# Altium PCB 主板-0915改综合.PcbDoc (part 1 of 3)
Units mm, origin at the board's own origin, x right, y up, seen from the top; angles counter-clockwise.
Board outline 97.69 x 103.45 mm, 2 copper layers (Top Layer, Bottom Layer); 78 components, 74 nets, 243 pads, 282 vias.
Unrouted connection lines stored in the file: 6.
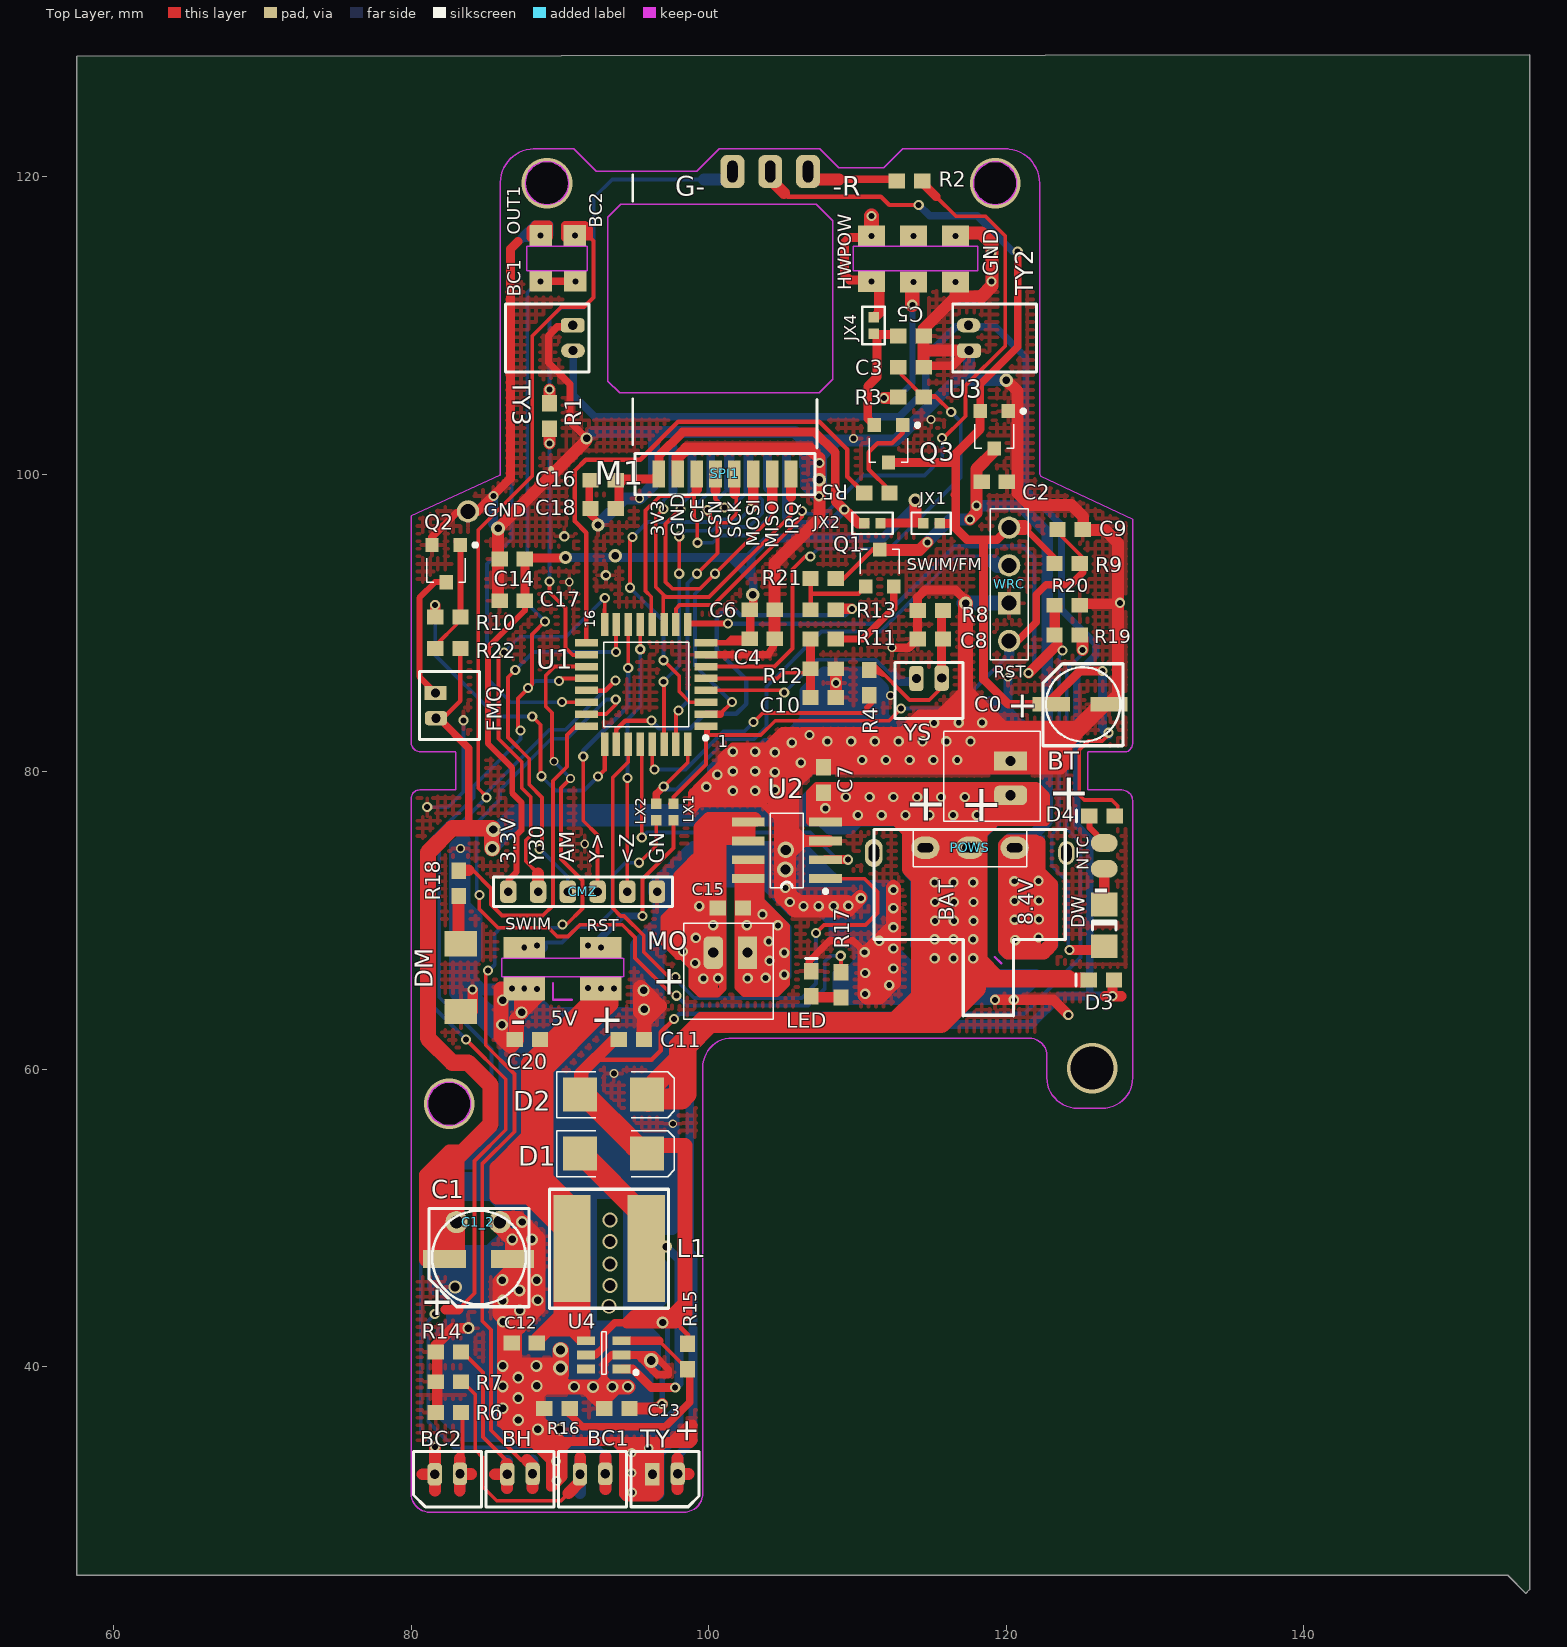
[diagram p0: Top Layer view]
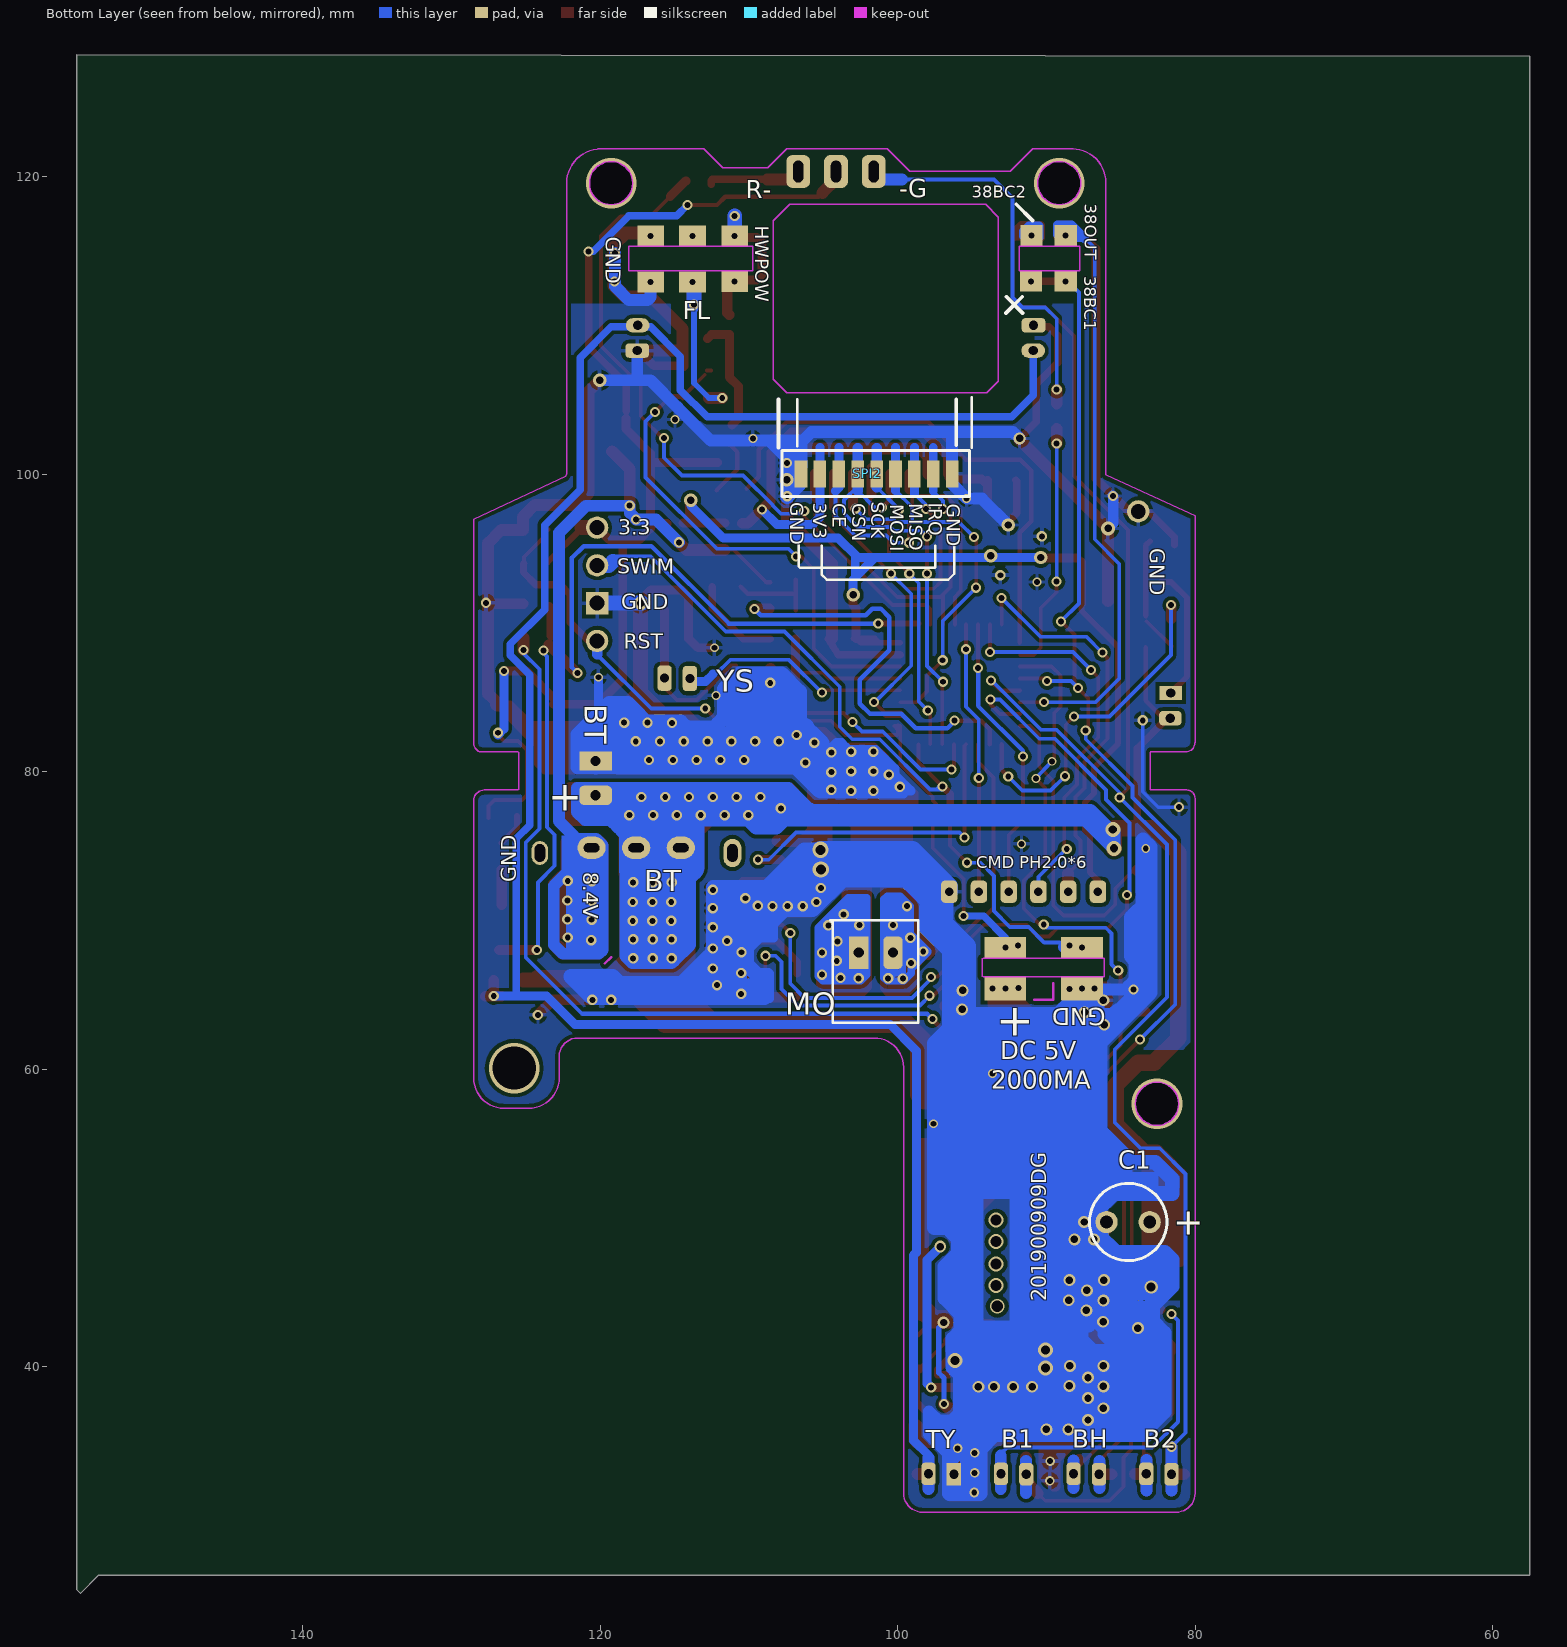
[diagram p1: Bottom Layer view, seen from below]

## Layer stack, top to bottom
Top Layer: signal copper 0.0356
Dielectric: dielectric 0.32, FR-4, Dk 4.8
Bottom Layer: signal copper 0.0356

## Board outline
57.506,128.118 57.506,25.984 153.721,25.984 154.94,24.765 155.194,25.019 155.194,128.219

## Design rules (kind name [scope] priority, off if disabled: settings)
Clearance [All] p1: gap=0.254
PolygonConnect [All] p1: connectstyle=Relief reliefconductorwidth=0.254 reliefentries=4 polygonreliefangle="90 Angle"
RoutingVias [All] p1: holewidth=0.711 width=1.27 viastyle="Through Hole" minholewidth=0.711 minwidth=1.27 maxholewidth=0.711 maxwidth=1.27
SilkscreenOverComponentPads [All] p1: minsilkscreentomaskgap=0.254
SolderMaskExpansion [All] p1: expansion=0.102
Width [All] p1: maxlimit=2 minlimit=0.254 preferedwidth=0.254 minimp=50.000000 maximp=50.000000 favimp=50.000000
27 further rules are at their usual default settings.

## Components (designator, comment, footprint, x,y, rotation, side; value= is the part's Value field where it differs from the comment)
BC1 "1.5*2P" MHDR1X2#1 92.88,32.8 r180 top locked (schematic designator BT)
BC2 "1.5*2P" MHDR1X2#1 83.12,32.8 r180 top locked (schematic designator BT)
BH "1.5*2P" MHDR1X2#1 88,32.8 r180 top locked (schematic designator BT)
BT "PH2.0-W" HDR1X2#1 120.3,78.032 r90 top locked
C0 "47uf  5*5.8" CC3216-1206#1 123.7,84.932 r0 top locked
C1 "220UF" CC3216-1206#2 85.3,46.785 r180 top locked
C1_2 "" HDR1X2#2 76.987,50.285 r180 top locked
C2 "0.1uf" CR1608-0603#1 119.2,99.5 r180 top locked
C3 "0.01uf" CR1608-0603#1 113.6,107.2 r180 top locked
C4 "0.1uf" CR1608-0603#1 103.6,88.951 r0 top locked (schematic designator C6)
C5 "10uf" CR1608-0603#1 113.6,109.3 r180 top locked (schematic designator C2)
C6 "0.01uf" CR1608-0603#1 103.6,90.9 r180 top locked (schematic designator C7)
C7 "0.1uf" CR1608-0603#1 107.723,79.45 r270 top locked (schematic designator C11)
C8 "0.01uf" CR1608-0603#1 114.9,88.932 r0 top locked
C9 "0.1uf" CR1608-0603#1 124.3,96.3 r180 top locked
C10 "0.01uf" CR1608-0603#1 107.7,85 r0 top locked (schematic designator R11)
C11 "10uf" CR1608-0603#1 94.8,62 r0 top locked
C12 "10uf" CR1608-0603#1 87.6,41.6 r180 top locked
C13 "1uf" CR1608-0603#1 93.83,37.2 r180 top locked
C14 "10uf" CR1608-0603#1 86.792,94.3 r180 top locked (schematic designator R6)
C15 "0.1uf" CR1608-0603#1 101.46,70.85 r0 top locked (schematic designator C4)
C16 "0.1uf" CR1608-0603#1 92.9,99.6 r0 top locked (schematic designator C4)
C17 "10uf" CR1608-0603#1 86.792,91.5 r180 top locked (schematic designator R6)
C18 "0.01uf" CR1608-0603#1 92.9,97.7 r0 top locked (schematic designator C4)
C20 "10uf" CR1608-0603#1 87.808,62 r0 top locked
CMZ "CMD PH2.0*6" MHDR1X7 94.15,71.944 r180 top locked
D1 "SS24" DSO-C2/X2.3 93.6,54.33 r0 top locked
D2 "SS24" DSO-C2/X2.3 93.6,58.3 r0 top locked (schematic designator D3)
D3 "SS14" CC1608-0603 126.4,66 r0 top locked (schematic designator D8)
D4 "SS14" CC1608-0603 126.441,77.038 r0 top (schematic designator R4)
DM "3*4*2小龟按钮" HDR1X2#3 85.344,70.032 r90 top locked (schematic designator FW)
DW "WD" CC3216-1206#3 126.6,69.672 r270 top
FMQ "1.5*2P" MHDR1X2#2 81.636,85.141 r270 top (schematic designator BT)
JX1 "" CR1005-0402 114.986,96.7 r0 top locked (schematic designator R8)
JX2 "" CR1005-0402 111,96.7 r180 top locked
JX4 "" CR1005-0402 111.1,110 r90 top locked (schematic designator R8)
L1 "22UH" L7 93.3,47.94 r180 top locked
LED "LED-DM" CC1608-0603 106.9,65.75 r270 top locked
LX1 "4.7K" CR1005-0402 97.638,77.292 r90 top locked (schematic designator R8)
LX2 "4.7K" CR1005-0402 96.469,77.292 r90 top locked (schematic designator R8)
MO "PH2.0-W" HDR1X2#4 103,67.843 r180 top locked (schematic designator BT)
POWS "SS12F23" HDR1X3 120.114,74.892 r180 top locked (schematic designator WS)
Q1 "S8050" SO-G3/C2.5 111.5,93.7 r0 top locked
Q2 "S8550" SO-G3/C2.5 82.35,94 r180 top locked
Q3 "S8550" SO-G3/C2.5 112.09,102.057 r180 top (schematic designator U5)
R1 "1K" CR1608-0603#1 89.3,103.919 r270 top locked
R2 "1K" CR1608-0603#1 113.5,119.732 r0 top locked
R3 "1K" CR1608-0603#1 113.6,105.2 r180 top locked
R4 "1K" CR1608-0603#1 110.8,86 r270 top locked
R5 "10K" CR1608-0603#1 111.303,98.755 r180 top (schematic designator R7)
R6 "500K" CR1608-0603#1 82.5,36.932 r180 top locked
R7 "500K" CR1608-0603#1 82.5,38.989 r0 top locked (schematic designator R6)
R8 "1M" CR1608-0603#1 114.9,90.856 r180 top locked
R9 "10K" CR1608-0603#1 124.1,94 r180 top locked
R10 "1K" CR1608-0603#2 82.46,90.4 r180 top (schematic designator R7)
R11 "1M" CR1608-0603#1 107.7,88.932 r180 top locked (schematic designator C10)
R12 "500K" CR1608-0603#1 107.7,86.932 r180 top locked
R13 "22K" CR1608-0603#1 107.7,90.9 r0 top locked
R14 "500K" CR1608-0603#1 82.5,41 r0 top locked (schematic designator R21)
R15 "100K" CR1608-0603#1 98.577,40.691 r270 top locked
R16 "7.89K" CR1608-0603#1 89.8,37.2 r180 top locked
R17 "1K" CR1608-0603#1 108.9,65.681 r90 top locked (schematic designator R19)
R18 "10K" CR1608-0603#1 83.2,72.5 r90 top locked
R19 "10K" CR1608-0603#1 124.1,89.2 r180 top locked (schematic designator R9)
R20 "4.7K" CR1608-0603#1 124.1,91.2 r180 top locked
R21 "22K" CR1608-0603#1 107.7,93 r180 top locked
R22 "10K" CR1608-0603#2 82.46,88.3 r180 top (schematic designator R7)
SPI1 "SI24R1" MHDR1X8 105.537,100.032 r180 top locked
SPI2 "NRF24RL01" MHDR1X8 97.6,100.032 r0 bottom locked
TY "1.5*2P" MHDR1X2#3 97.75,32.8 r180 top locked (schematic designator BT)
TY2 "1.5*2P" MHDR1X2#4 117.475,109.855 r270 top locked (schematic designator BT)
TY3 "1.5*2P" MHDR1X2#4 90.881,108.483 r90 top locked (schematic designator BT)
U1 "STM8L151K4T6" TQFP32 95.8,85.877 r180 top locked
U2 "MX380（RZ7889D）" SO8 105.254,74.722 r90 top locked
U3 "ME6209-V1RK" SO-G3/C2.5 119.2,103 r180 top locked (schematic designator U5)
U4 "SX1308   B6287K  B6286" SOT23-6_M 92.95,40.8 r180 top locked
WRC "2.54HP" HDR1X4 120.2,88.8 r90 top locked (schematic designator SX)
YS "1.5*2P" MHDR1X2#5 115.5,86.3 r180 top locked (schematic designator BT)

## Footprints (in the part's own frame and the unit in brackets; to place one, negate y for a bottom-side part, rotate by r counter-clockwise, add the part's x,y. Pads: shape width x height; smd on the part's side, far side on the other; paste and mask are expansions set on the pad)
CC1608-0603 [mm] "Chip Capacitor; B"
  rect 1.1x1 smd: 1(-0.85,0) 2(0.85,0)
  silkscreen extent -1.7,-0.4 -1.7,0.4
CC3216-1206#1 [mm]
  rect 2.5x1 smd: 1(-0.662,-0.386) 2(3.213,-0.386)
CC3216-1206#2 [mm]
  rect 2.9x1.2 smd: 1(-1.5,-0.45) 2(3.068,-0.455)
CC3216-1206#3 [mm] "Chip Capacitor; Body 3.2 x 1.6 mm (LxW t"
  rect 1.6x1.8 smd: 1(-1.4,0) 2(1.4,0)
  silkscreen extent -0.3,-0.8 0.3,0.8
CR1005-0402 [mm]
  rect 0.7x0.7 smd: 1(-0.55,0) 2(0.55,0)
CR1608-0603#1 [mm]
  rect 1.1x1 smd: 1(-0.85,0) 2(0.85,0)
CR1608-0603#2 [mm]
  rect 1.1x1 smd: 1(-0.85,0)
  rect 1.1x1 smd paste+0: 2(0.85,0)
DSO-C2/X2.3 [mm] "DO-214-AA/SMB; 2 C-Bend Leads; Body 5.3 x 3.6 mm, inc. leads (LxW)"
  rect 2.3x2.3 smd: 1(-2.25,0) 2(2.25,0)
  silkscreen extent -3.8,-1.55 4.1,1.55
HDR1X2#1 [mm]
  rrect50% 1.3x2.2 hole 0.68: 1(0.39,0)
  rect 1.3x2.2 hole 0.68: 2(2.692,0.003)
  silkscreen extent -1.34,-1.99 4.68,4.49
HDR1X2#2 [mm] "Connector; Header; 2 Position"
  round 1.5 hole 0.86: 1(-8.963,0.558) 2(-6.063,0.558)
HDR1X2#3 [mm]
  rect 1.7x2.2 smd: 1(-6.147,2.004) 2(-1.6,2.004)
HDR1X2#4 [mm]
  rect 1.3x2.2 hole 0.68: 1(0.39,0)
  rrect50% 1.3x2.2 hole 0.68: 2(2.692,0.003)
  silkscreen extent -1.34,-1.99 4.68,4.49
HDR1X3 [mm]
  oval 1.9x1.5 hole 0.6 slot 1.05 at 0 deg: 1(-0.46,0) 2(2.54,0) 3(5.54,0)
  silkscreen extent -1.27,-1.27 6.35,1.27
HDR1X4 [mm]
  round 1.5 hole 1: 1(0,0) 3(5.08,0) 4(7.62,0)
  rect 1.5x1.5 hole 1: 2(2.54,0)
  silkscreen extent -1.27,-1.27 8.89,1.27
L7 [mm]
  rect 2.5x7.2 smd: 1(2.5,0) 2(-2.5,0)
  silkscreen extent -4,-4 4,4
MHDR1X2#1 [mm]
  rrect50% 0.96x1.5 hole 0.62: 1(-0.164,0) 2(1.536,0.026)
  silkscreen extent -1.6,-1.49 2.97,2.22
MHDR1X2#2 [mm]
  rect 0.96x1.5 hole 0.62: 1(-0.164,0)
  rrect50% 0.96x1.5 hole 0.62: 2(1.536,0.026)
  silkscreen extent -1.6,-1.07 2.97,2.97
MHDR1X2#3 [mm]
  rrect50% 0.96x1.5 hole 0.62: 1(-0.164,0)
  rect 0.96x1.5 hole 0.62: 2(1.536,0.026)
  silkscreen extent -1.6,-1.52 2.97,2.22
MHDR1X2#4 [mm]
  oval 0.96x1.6 hole 0.62: 1(-0.164,0)
  rrect50% 0.96x1.6 hole 0.62: 2(1.536,0.026)
  silkscreen extent -1.6,-1.07 2.97,4.55
MHDR1X2#5 [mm]
  rrect50% 0.96x1.7 hole 0.62: 1(-0.164,0) 2(1.536,0.026)
  silkscreen extent -1.6,-1.07 2.97,2.72
MHDR1X7 [mm] "Connector; Header; 7 Position"
  rrect50% 1.1x1.5 hole 0.58: 2(-2.38,0) 3(-0.38,0) 4(1.62,0) 5(3.62,0) 6(5.62,0) 7(7.62,0)
  silkscreen extent -3.41,-1 8.62,1
MHDR1X8 [mm] "Connector; Header; 8 Position"
  rect 0.85x1.8 smd: 1(0,0) 2(1.27,0) 3(2.54,0) 4(3.81,0) 5(5.08,0) 6(6.35,0) 7(7.62,0) 8(8.89,0)
  silkscreen extent -1.6,-1.37 10.49,1.4
SO8 [mm]
  rect 0.6x2.2 smd: 1(-1.905,-2.6) 2(-0.635,-2.6) 3(0.635,-2.6) 4(1.905,-2.6) 5(1.905,2.6) 6(0.635,2.6) 7(-0.635,2.6) 8(-1.905,2.6)
  silkscreen extent -2.88,-2.72 2.5,1.1
SO-G3/C2.5 [mm]
  rect 0.9x0.95 smd: 1(-0.95,-1.25) 2(0.95,-1.25) 3(0,1.25)
  silkscreen extent -1.3,-0.38 1.3,1.25
SOT23-6_M [mm]
  rect 1.2x0.59 smd: 1(-1.2,0.95) 2(-1.2,0) 3(-1.2,-0.95) 4(1.2,-0.95) 5(1.2,0) 6(1.2,0.95)
  silkscreen extent -2.29,-1.55 0.15,1.31
TQFP32 [mm] "QFP; 32 Leads; Body 7 x 7 mm; Pitch 0.8 mm"
  rect 1.55x0.5 smd: 1(-4.025,2.8) 2(-4.025,2) 3(-4.025,1.2) 4(-4.025,0.4) 5(-4.025,-0.4) 6(-4.025,-1.2) 7(-4.025,-2) 8(-4.025,-2.8) 18(4.025,-2) 19(4.025,-1.2) 20(4.025,-0.4) 21(4.025,0.4) 22(4.025,1.2) 23(4.025,2) 24(4.025,2.8)
  rect 0.5x1.55 smd: 9(-2.8,-4.025) 10(-2,-4.025) 11(-1.2,-4.025) 12(-0.4,-4.025) 13(0.4,-4.025) 14(1.2,-4.025) 15(2,-4.025) 16(2.8,-4.025) 26(2,4.025) 27(1.2,4.025) 28(0.4,4.025) 29(-0.4,4.025) 30(-1.2,4.025) 31(-2,4.025) 32(-2.8,4.025)
  rect 1.55x0.5 smd mask+0.102: 17(4.025,-2.8)
  rect 0.5x1.55 smd paste+0: 25(2.8,4.025)
  silkscreen extent -4.13,-2.85 2.85,3.72

## Part data
D3: library part "Cap Semi", "Capacitor (Sem"
DW: library part "Cap Semi"
LX2: library part Res3
U1: library part ST72F324K4T6

## Free pads (board coordinates)
  rect 2.8x1.6 hole 0.4: 0(87.6,65.432)
  rect 2.8x1.4 hole 0.4: 0(87.6,68.182) 0(92.75,68.182)
  rect 1.5x1.4 hole 0.4: 0(88.7,112.98) 0(88.7,116.053) 0(91,116.053) 0(91.032,112.98)
  round 0.4 smd: 0(89.408,100.355)
  rect 2.8x1.6 hole 0.4 mask+0.102: 0(92.75,65.432)
  rect 0.85x1.8 smd far side: 0(96.33,100.032)
  rrect50% 1.6x2.2 hole 0.68 slot 1.46 at 90 deg: 0(101.6,120.36) 0(104.14,120.36) 0(106.68,120.36)
  rect 1.8x1.4 hole 0.4: 0(110.95,112.956) 0(110.95,116.032) 0(113.78,112.932) 0(113.78,116.032) 0(116.6,112.932) 0(116.6,116.032)
  oval 1.2x1.9 hole 0.7 slot 1.2 at 90 deg: 3(111.103,74.545)
  round 1.5 hole 1 paste+0: 4(83.82,97.511)
  oval 1.1x1.6 hole 0.7 slot 1.2 at 90 deg: 4(124.051,74.545)
  oval 1.8x1.2 smd: 4(126.6,73.482) 4(126.6,75.209)

## Via types
v1: diameter 0.7, hole 0.4, Top Layer to Bottom Layer, 111 vias
v2: diameter 0.68, hole 0.4, Top Layer to Bottom Layer, 90 vias
v3: diameter 0.8, hole 0.5, Top Layer to Bottom Layer, tented both sides, 27 vias
v4: diameter 0.6, hole 0.4, Top Layer to Bottom Layer, 13 vias
v5: diameter 0.9, hole 0.5, Top Layer to Bottom Layer, 8 vias
v6: diameter 0.65, hole 0.4, Top Layer to Bottom Layer, tented both sides, 6 vias
v7: diameter 0.8, hole 0.5, Top Layer to Bottom Layer, 6 vias
v8: diameter 1, hole 0.75, Top Layer to Bottom Layer, tented both sides, 5 vias
v9: diameter 3.4, hole 2.9, Top Layer to Bottom Layer, 4 vias
v10: diameter 0.8, hole 0.4, Top Layer to Bottom Layer, 2 vias
v11: diameter 1.1, hole 0.68, Top Layer to Bottom Layer, 2 vias
v12: diameter 1, hole 0.56, Top Layer to Bottom Layer, tented both sides, 2 vias
v13: diameter 1, hole 0.6, Top Layer to Bottom Layer, tented both sides, 2 vias
v14: diameter 0.9, hole 0.6, Top Layer to Bottom Layer, tented both sides, 1 vias
v15: diameter 0.95, hole 0.5, Top Layer to Bottom Layer, 1 vias
v16: diameter 0.7, hole 0.4, Top Layer to Bottom Layer, tented bottom, 1 vias
v17: diameter 1, hole 0.6, Top Layer to Bottom Layer, tented bottom, 1 vias

## Nets (pads, with @x,y where several pads share a name; then routed paths per layer and width w, separated by ;. In a path a pad name is that pad's centre, name@x,y a point inside that pad or via, vN(x,y) a via of type N, cw(c..) or ccw(c..) an arc to the next point about the centre after c; other vN are vias at no path point)
1D-: D1.1 L1.2 U4.1 | length 22.5
  Top Layer w0.59: U4.1@94.2,39.85 94.897,39.85 96.139,38.608 v16@97.638,38.608
  Top Layer w0.8: L1.2@95.8,49.98 95.8,49.081 96.23,48.652 L1.2@96.23,49.476
  Top Layer w1.5: D1.1@91.35,54.43 L1.2@95.8,49.98
  Bottom Layer w0.6: v3(97.13,48.082) 98.019,47.193 98.019,38.887 v16(97.739,38.608)
1R-1: R15.2 R16.1 U4.3 | length 17.1
  Top Layer w0.254: 96.655,41.75 R15.2@98.564,39.841
  Top Layer w0.5: R16.1@90.85,37.2 90.673,37.023 90.673,36.809 91.516,35.966 97.079,35.966 98.73,37.617 R15.2@98.73,39.841
  Top Layer w0.59: U4.3@94.15,41.75 96.655,41.75 ; R15.2@98.564,39.841 R15.2@98.73,39.841
3-BH: BH.2 R14.2 | length 13
  Top Layer w0.254: R14.2@83.45,41 84.836,39.614 84.836,35.281 86.411,33.706 BH.2@86.411,33.477
  Top Layer w0.8: 85.623,32.774 BH.2@86.464,32.774 ; BH.2@86.411,33.477 86.436,33.452 86.436,31.852
  Bottom Layer w0.8: 86.436,31.852 86.436,33.655
3-WZ: BC2.1 R6.1 | length 10.2
  Top Layer w0.254: BC2.1@83.284,32.8 83.24,32.8 83.45,33.01 R6.1@83.45,36.932
  Top Layer w0.8: 83.261,31.674 83.261,33.833 ; BC2.1@83.284,32.8 83.293,32.791 84.023,32.791
  Bottom Layer w0.3: 83.284,31.793 BC2.1@83.284,32.8
  Bottom Layer w0.8: 83.261,31.674 83.266,33.731
3.3V: C0.1 C4.1 C6.2 C14.1 C16.2 C17.1 C18.2 CMZ.7 D4.2 JX1.1 JX1.2 JX2.1 JX2.2 pad.0@104.14,120.36 Q3.3 R9.2 SPI1.8 SPI2.7 U1.8 U3.2 WRC.4 | length 190.5
  Top Layer w0.254: v2(126.873,82.626) 126.873,82.474 126.467,82.067 125.527,82.067 124.917,81.458 124.917,78.435 125.247,78.105 127.102,78.105 127.508,77.699 D4.2@127.508,76.886
  Top Layer w0.3: 105.054,118.923 105.308,118.669 111.582,118.669 112.141,118.11 v2(114.122,118.11)
  Top Layer w0.4: CMZ.7@86.53,71.944 86.53,72.712 87.071,73.254 87.071,75.743 87.401,76.073 87.401,77.953 86.792,78.562 86.792,80.264 85.166,81.89 85.166,88.367 87.642,90.842 C17.1@87.642,91.5 ; C16.2@93.966,99.593 94.056,99.593 C16.2@94.158,99.492 ; SPI1.8@96.647,99.746 SPI1.8@96.647,100.032 ; U1.8@99.825,88.677 100.711,88.677 ; C4.1@102.667,88.873 102.472,88.677 100.711,88.677 ; C4.1@102.95,88.951 101.518,88.951 101.244,88.677 100.711,88.677 ; 121.207,96.42 R9.2@123.539,94.089
  Top Layer w0.5: U3.2@118.25,104.25 118.25,106.055 120.777,108.582 v2(120.777,114.986)
  Top Layer w0.6: C17.1@87.642,91.3 C14.1@87.642,94.1 ; C14.1@87.928,94.386 v5@90.348,94.386 ; C18.2@93.966,97.866 C16.2@93.966,99.593 ; C16.2@94.158,99.492 94.361,99.695 96.31,99.695 SPI1.8@96.647,100.032 96.647,101.239 98.252,102.845 107.137,102.845 108.509,101.473 108.509,98.298 108.56,98.247 ; C4.1@102.794,88.949 102.794,91.008 102.997,91.211 v5@102.997,91.897 ; JX2.1@111.608,96.725 JX1.1@114.436,96.725 ; Q3.3@112.09,100.807 116.591,100.807 ; JX1.2@115.494,96.695 116.611,96.695 ; 116.561,98.628 116.611,98.577 ; 118.25,103.75 118.25,103.035 116.611,101.397 116.611,98.577 ; 118.339,95.606 118.478,95.466 118.478,86.22 120.153,84.546 C0.1@123.038,84.546 ; WRC.4@120.2,96.42 119.386,95.606 117.373,95.606 116.611,96.368 116.611,98.577 ; C0.1@123.138,84.546 C0.1@123.038,84.546 ; v2(126.467,86.792) 124.968,86.792 123.038,84.862 C0.1@123.038,84.546
  Top Layer w0.7: 108.56,98.247 108.56,98.196 110.056,96.7 JX2.2@110.449,96.7
  Top Layer w0.8: pad.0@104.14,120.36 104.14,119.837 105.054,118.923 ; 113.894,96.876 v5(113.894,98.247)
  Top Layer w1: WRC.4@120.2,96.42 121.207,96.42
  Bottom Layer w0.5: v2(114.122,118.11) 114.859,117.373 118.059,117.373 120.447,114.986 v2(120.777,114.986)
  Bottom Layer w0.6: v5(90.373,94.412) 101.498,94.412 ; 102.692,94.412 103.988,95.707 111.709,95.707 113.894,97.892 v5(113.894,98.247) ; 102.845,93.167 102.845,94.412 101.498,94.412 ; v5(102.972,91.897) 102.997,91.923 102.997,92.913 101.498,94.412 ; 105.22,101.803 105.22,97.116 105.694,96.642 108.123,96.642 v2(109.118,97.638) ; WRC.4@120.2,96.42 WRC.4@120.2,96.716 ; v2(126.467,86.792) 126.467,82.88 126.873,82.474 v2(126.873,82.626)
  other v5: 93.726,94.539
3V3: 
5V: C12.1 C20.2 L1.1 pad.0@92.75,65.432 U4.4 | length 99.1
  Top Layer w0.4: U4.4@91.498,41.75 91.318,41.826 U4.4@91.75,41.75
  Top Layer w0.7: L1.1@90.805,45.263 91.059,45.009 91.059,42.189 U4.4@91.389,41.859 ; 90.856,42.393 88.849,42.393 ; 88.849,42.393 89.954,43.497 90.272,43.815 90.272,43.422 C12.1@88.45,41.6 88.45,41.689 88.45,41.993 88.849,42.393
  Top Layer w0.8: C12.1@88.45,41.6 C12.1@88.45,41.689 ; 88.519,52.349 88.519,53.264 ; 88.849,51.664 90.8,49.713 90.8,48.519 L1.1@90.8,47.94 ; 89.954,43.497 89.954,47.094 L1.1@90.8,47.94 ; 90.272,43.815 90.272,45.263 L1.1@90.8,47.94 ; 90.856,42.393 U4.4@91.389,41.859 ; L1.1@91.389,47.351 L1.1@90.8,47.94 ; U4.4@91.65,41.859 L1.1@91.65,47.351 ; 88.519,53.264 88.557,53.302 88.557,56.363 88.519,56.325 88.519,53.264
  Top Layer w1: 87.884,55.499 85.776,53.391 85.776,51.41 87.63,51.41 87.884,51.664 ; 88.849,51.664 87.884,51.664 ; 88.925,59.868 92.75,63.692 ; 88.925,60.833 pad.0@92.75,64.658 ; L1.1@90.8,48.519 87.884,51.435 87.884,51.664 ; L1.1@90.8,49.713 90.8,50.957 89.052,52.705 89.052,56.363 ; pad.0@91.948,64.846 91.948,64.491 87.884,60.427 87.884,51.664 ; 89.052,56.363 88.557,56.363 88.557,60.008 88.138,60.427 88.621,60.427 89.052,59.995 89.052,56.363 ; 92.75,63.692 93.447,64.389 93.447,64.735 pad.0@92.75,65.432 pad.0@92.75,64.658 ; 92.75,63.692 pad.0@92.75,64.658
  other v1: 93.624,65.43 91.872,65.456
8.4V: C2.2 POWS.1 Q1.3 R21.1 U3.3 | length 93.3
  Top Layer w0.3: R21.1@108.571,92.761 108.839,92.761 111.028,94.95 Q1.3@111.5,94.95
  Top Layer w0.4: v1@122.25,72.746 122.452,72.746 122.795,72.746
  Top Layer w0.8: Q1.3@111.633,94.92 114.193,94.92 v2(114.706,95.433) ; v2(117.577,96.977) 118.008,97.409 118.008,100.358 U3.3@119.2,101.55 ; 122.25,75.286 122.25,73.29 122.795,72.746 123.088,72.452 123.088,68.351 122.911,68.174 122.809,68.174 ; 122.422,69.127 122.43,70.077 122.441,71.347 122.452,72.667 122.452,72.746 v1@122.453,72.873
  Top Layer w1: POWS.1@120.117,74.409 POWS.1@119.939,74.587 ; 120.303,73.822 POWS.1@120.303,74.223 ; POWS.1@121.234,75.108 121.412,75.286 ; 121.945,75.196 121.945,75.286 121.412,75.286 ; 122.809,68.174 122.53,67.894 120.117,67.894 119.939,68.072 POWS.1@119.939,74.587 ; POWS.1@119.939,74.587 119.939,75.057 120.167,75.286 121.412,75.286
  Bottom Layer w0.8: v2(114.706,95.433) 116.25,96.977 v2(117.577,96.977) ; 116.738,96.977 v2(117.577,96.977) ; v2(117.577,96.977) 118.008,97.409 v2(118.008,97.892) 120.946,97.892 122.762,96.076 122.762,76.686 121.828,75.753 122.098,75.483 ; 122.098,75.483 120.263,75.483 119.837,75.057 119.837,68.021 120.091,67.767 122.504,67.767 123.114,68.377 123.114,72.339 122.098,73.355 122.098,75.483
  Bottom Layer w1: POWS.1@120.091,74.409 POWS.1@120.574,74.892 ; POWS.1@121.082,75.235 POWS.1@121.209,75.108 ; POWS.1@121.412,75.108 121.564,75.26 ; 121.92,73.177 121.92,75.286
  other v1: 120.599,68.682 122.174,68.859 120.574,70.053 122.199,70.079 120.574,71.323 122.199,71.349 120.548,72.644 122.174,72.669
8V: 
38BC1: BC1.1 pad.0@88.7,112.98 pad.0@91.032,112.98 U1.20 | length 110
  Top Layer w0.254: 83.172,43.853 84.261,44.942 84.261,53.84 86.36,55.939 86.36,59.334 v2(83.693,62.001) ; v2(87.351,82.779) 87.173,82.956 87.173,84.938 88.113,85.877 88.113,89.23 v2(89.002,90.119) ; v2(89.941,86.106) 90.113,86.278 U1.20@91.775,86.278
  Top Layer w0.5: pad.0@88.7,112.98 pad.0@91.032,112.98
  Top Layer w0.7: 82.334,43.853 83.172,43.853
  Top Layer w0.8: 93.066,31.775 93.066,33.934
  Bottom Layer w0.254: v2(81.585,43.536) 81.153,43.104 81.153,36.297 82.872,34.577 92.626,34.577 92.944,34.259 BC1.1@92.944,32.8 ; v2(83.693,62.001) 81.331,64.364 81.331,75.413 84.201,78.283 84.201,79.045 87.351,82.194 v2(87.351,82.779) ; v2(87.859,85.623) 88.341,86.106 v2@90.043,86.106 ; pad.0@88.57,112.98 87.808,112.218 87.808,91.313 v2(89.002,90.119)
  Bottom Layer w0.8: 93.066,31.775 93.066,34.026
38BC2: BC2.2 pad.0@91,116.053 U1.21 | length 120.5
  Top Layer w0.254: v2(85.065,78.283) 85.065,78.334 84.502,78.896 84.502,96.262 88.138,99.898 88.138,109.296 90.094,111.252 91.618,111.252 92.256,111.89 92.256,115.694 91.923,116.027 ; U1.21@91.775,85.478 U1.21@91.807,85.446
  Top Layer w0.3: U1.21@91.807,85.446 93.04,85.446 v2(93.726,86.131)
  Top Layer w0.6: pad.0@90.373,115.937 90.373,116.738 91.669,116.738 91.923,116.484 91.923,116.027 91.211,116.027 91.121,115.937 pad.0@90.373,115.937
  Top Layer w0.8: 80.755,32.774 BC2.2@81.584,32.774 ; 81.588,31.674 v2(81.588,34.62)
  Bottom Layer w0.254: v2(81.588,34.62) 80.645,35.563 80.645,52.96 82.371,54.686 83.668,54.686 85.395,56.413 85.395,61.341 81.89,64.846 81.89,75.108 v2(85.065,78.283) 85.065,78.588 89.306,82.829 90.366,82.829 93.668,86.131 v2(93.726,86.131)
  Bottom Layer w0.6: pad.0@90.765,115.937 90.5,115.937 90.5,116.713 91.161,116.713 91.542,116.332 91.542,116.027 pad.0@90.958,116.027
  Bottom Layer w0.8: 81.588,31.674 v2(81.588,34.62)
38OUT-1: pad.0@88.7,116.053 U1.22 | length 46.3
  Top Layer w0.254: v2(90.145,84.684) 90.151,84.678 U1.22@91.775,84.678
  Top Layer w0.6: pad.0@88.065,115.938 88.065,116.462 88.367,116.764 89.23,116.764 pad.0@89.23,115.951
  Bottom Layer w0.254: pad.0@88.8,116.053 87.58,116.053 86.741,115.214 86.741,95.631 85.09,93.98 85.09,86.284 86.69,84.684 v2@89.843,84.684
  Bottom Layer w0.6: 87.398,115.828 87.507,115.937 88.683,115.937 88.8,116.053 88.887,116.14 89.256,116.14 89.256,116.764 88.29,116.764 87.58,116.053
38OUT-2: 
84-D: 
84ADC: Q1.2 R11.1 | length 6.2
  Top Layer w0.5: R11.1@108.55,88.932 110.369,88.932 112.45,91.012 Q1.2@112.45,92.45
<Z: CMZ.3 U1.13 | length 18.6
  Top Layer w0.254: CMZ.3@94.53,71.944 94.53,79.569 v2(94.539,79.578) ; U1.13@95.4,89.902 v2(95.4,88.242) v2@95.58,88.062
  Bottom Layer w0.254: v2(94.539,79.578) 94.539,83.515 95.402,84.379 v2@95.402,88.242
AM: CMZ.5 U1.15 | length 26
  Top Layer w0.254: v2(86.995,86.843) 86.512,86.36 86.512,82.303 87.935,80.881 87.935,79.146 88.798,78.283 88.798,74.987 v2(88.624,74.813) ; v2(93.777,88.062) U1.15@93.777,89.902
  Bottom Layer w0.254: v2(86.995,86.843) 88.214,88.062 v2(93.777,88.062) ; v2@88.662,74.813 90.53,72.944 CMZ.5@90.53,71.944
AM-D: 
BH: BH.1 U1.19 | length 69.6
  Top Layer w0.254: v2@85.166,66.599 85.014,66.446 85.014,61.62 86.944,59.69 86.944,55.805 84.769,53.63 84.769,43.095 85.369,42.494 85.369,35.738 87.376,33.731 87.782,33.731 ; v4(89.611,80.709) 89.459,80.861 89.459,83.972 89.052,84.379 89.052,86.487 89.643,87.077 U1.19@91.775,87.077 ; v2(90.17,69.723) 90.424,69.723 91.516,70.815 91.516,72.695 90.068,74.143 90.068,78.918 v4(90.703,79.553) v4@90.754,79.553
  Top Layer w0.8: 87.782,33.731 88.163,33.35 88.163,31.852
  Bottom Layer w0.254: v2@85.166,66.599 85.623,67.056 85.623,69.139 86.004,69.52 89.967,69.52 v2(90.17,69.723) ; v4(89.611,80.709) v4@90.729,79.553 ; v4(90.703,79.553) v4@90.754,79.553
  Bottom Layer w0.8: 88.163,31.852 88.163,33.706
  other v2: 85.166,66.65
BI-R: U1.28 U2.2 | length 22.6
  Top Layer w0.254: U1.28@95.4,81.853 95.504,81.749 v2(95.504,75.59)
  Top Layer w0.6: U2.2@107.854,74.092 v2(109.372,74.092)
  Bottom Layer w0.254: v2(95.504,75.59) 95.834,75.921 106.832,75.921 108.661,74.092 v2(109.372,74.092)
BT: BT.1 C1.2 C1_2.2 C7.2 D2.2 D3.1 FMQ.2 POWS.2 POWS.3 R22.1 U2.4 | length 384.5
  Top Layer w0.3: FMQ.2@81.661,83.605 82.132,83.605 83.31,84.783 R22.1@83.31,88.366
  Top Layer w0.5: FMQ.2@81.9,83.56 83.871,81.589 83.871,76.048 ; 97.079,58.166 97.587,58.674 97.587,59.782 ; 97.587,60.655 97.587,61.747 ; 98.273,61.341 98.273,62.433 97.587,61.747 ; 98.984,63.144 100.076,63.144 100.416,63.144 100.873,63.602 99.441,63.602 97.587,61.747
  Top Layer w0.6: U2.4@106.858,76.657 106.858,78.588 107.29,79.019 122.022,79.019 122.657,78.384 122.657,76.657 119.024,76.657 115.164,76.657 113.005,76.657 U2.4@106.858,76.657
  Top Layer w1: 81.61,52.578 81.61,47.676 81.509,47.676 81.026,47.193 81.026,52.883 82.08,53.937 ; 81.944,50.372 81.944,47.24 C1.2@82.232,47.24 82.08,47.392 82.08,53.937 ; C1_2.2@83.05,49.727 83.05,50.656 ; 83.515,54.432 82.575,54.432 82.08,53.937 ; 113.487,76.175 113.487,73.457 114.351,72.593 ; v1@114.859,72.517 115.672,72.517 ; v1@114.884,69.926 115.697,69.926 ; v1@114.884,71.196 115.697,71.196 ; v1@115.164,72.644 117.373,72.644 ; 115.282,66.158 115.44,66 124.395,66 ; 115.672,67.462 v1(116.459,67.462) v1(117.78,67.462) v1@117.881,67.462 ; 115.672,68.732 v1(116.459,68.732) v1(117.78,68.732) v1@117.881,68.732 ; 115.672,72.568 v1(116.459,72.568) v1(117.78,72.568) v1@117.881,72.568 ; 115.697,69.977 v1(116.484,69.977) v1(117.805,69.977) v1@117.907,69.977 ; 115.697,71.247 v1(116.484,71.247) v1(117.805,71.247) v1@117.907,71.247 ; 117.373,72.593 v1@117.615,72.834 ; 119.024,76.657 118.262,75.895 118.262,73.152 118.237,73.127 ; D3.1@125.15,66 124.395,66 ; v1@117.615,72.834 118.237,73.457 118.237,73.127 ; v1@117.615,72.834 117.945,72.834 118.237,73.127 ; 118.237,73.127 118.237,67.361 119.405,66.192 124.202,66.192 124.395,66
  Top Layer w1.1: C1_2.2@83.033,49.727 83.033,54 85.327,56.294 85.327,58.945 83.82,60.452 82.753,60.452 81.128,62.078 81.128,74.574 82.753,76.2 85.446,76.2 v12(85.446,74.854) ; 83.05,47.898 C1_2.2@83.05,49.727
  Top Layer w1.2: 112.166,77.292 112.37,77.292 113.005,76.657 POWS.3@114.174,75.488 ; 115.164,77.724 117.932,77.724
  Top Layer w1.4: D2.2@95.85,58.166 D2.2@95.91,58.166 ; D2.2@95.91,57.836 D2.2@95.91,58.166 ; 98.476,61.544 100.076,63.144 ; 100.416,63.144 112.573,63.144 ; 113.513,63.17 115.164,63.17 ; 114.097,64.668 112.573,63.144 ; 117.932,77.724 117.932,65.456 115.621,63.144 112.573,63.144 ; D2.2@95.91,58.166 96.063,58.014 98.171,58.014 98.476,58.318 98.476,61.138 95.91,58.572 D2.2@95.91,58.166
  Top Layer w1.5: 114.351,64.922 114.351,72.593 ; v1@115.164,72.593 115.164,72.644 115.164,76.657 115.164,77.724 ; 120.345,77.216 120.345,77.572
  Bottom Layer w0.8: 105.693,77.27 105.896,77.473 107.34,78.918 117.132,78.918 ; 106.161,77.739 cw(c107.595,76.305) 107.595,78.333 ; 106.829,77.473 107.224,77.079 107.544,76.759 108.128,76.175 109.525,76.175 110.058,76.708 ; v1@110.338,76.987 110.058,76.708 ; 118.389,76.683 118.389,76.708 ; 121.219,77.079 120.828,77.079 119.771,77.079 118.785,77.079 118.415,77.079 ; 110.058,76.708 113.995,76.708 118.389,76.708 ; 110.058,76.708 108.102,76.708 108.052,76.759 107.732,77.079 113.995,77.079 118.389,77.079 118.415,77.079 ; 117.132,78.918 118.415,77.635 118.415,77.079 ; 117.132,78.918 121.552,78.918 121.552,77.297 121.026,76.771 120.752,76.771 120.735,76.755 118.462,76.755 118.436,76.755 118.415,76.733 ; 118.389,76.708 118.415,76.708 118.415,76.733 ; 118.389,76.708 118.415,76.733 ; 118.415,76.733 118.415,77.079
  Bottom Layer w0.9: v12@85.877,76.225 87.053,77.401 105.824,77.401 105.896,77.473 106.829,77.473 ; 86.309,76.251 86.494,76.066 85.446,76.066 v12(85.446,74.854) 87.351,76.759 86.462,76.759 ; 86.817,76.759 107.544,76.759 108.052,76.759 108.636,76.759 ; 107.224,77.079 107.732,77.079
  Bottom Layer w1: 114.376,73.685 117.678,73.685 ; 114.935,72.314 114.935,67.539 115.214,67.259 117.831,67.259 118.212,67.64 118.212,76.505 118.389,76.683 ; v1@115.083,67.356 114.046,68.393 114.046,73 117.348,73 ; 118.389,76.708 118.389,77.079 118.389,77.14
  Bottom Layer w1.3: 118.608,78.537 118.461,78.389 119.278,77.572 119.771,77.079 ; 120.828,77.079 120.828,77.47
  Bottom Layer w2: 113.995,77.114 113.995,77.079 113.995,76.708 113.995,73.609 114.605,73 ; 117.348,73 117.729,73.381 117.729,76.022 118.212,76.505 ; 118.389,76.683 118.415,76.708 118.462,76.755 118.785,77.079 119.278,77.572 BT.1@119.99,78.283
  other v1: 115.189,67.462 115.189,68.732 115.214,69.977 115.214,71.247 115.189,72.568 110.033,77.089 111.633,77.089 113.233,77.089 114.833,77.089 116.433,77.089 118.033,77.089 107.848,77.546 109.221,78.308 110.821,78.308 112.421,78.308 114.021,78.308 115.621,78.308 117.221,78.308
  other v12: 85.522,76.124
BTJC: 
C-84: C11.1 C13.1 D1.2 D2.1 R15.1 R19.1 U4.5 | length 110.3
  Top Layer w0.3: D2.1@91.35,58.887 91.599,59.136 91.77,58.965 91.77,60.223 92.202,60.655 96.164,60.655 96.774,61.265 96.774,62.484 v2(97.663,63.373) ; v7@97.104,43.18 97.561,43.18 98.628,42.113
  Top Layer w0.5: D2.1@91.35,58.166 D2.1@91.77,58.166 ; U4.5@91.75,40.8 92.413,40.8 92.939,41.326 92.939,42.215 93.685,42.961 94.513,42.961 ; D1.2@95.506,54.43 D1.2@95.85,54.43
  Top Layer w0.8: D2.1@91.35,58.166 91.35,58.887 91.35,59.688 93.662,62 C11.1@93.95,62 ; C13.1@94.68,37.2 96.585,37.2 v2(96.876,37.49) ; v7(96.901,42.977) 97.444,42.977 97.896,43.429 ; 98.4,43.586 97.774,42.961 94.513,42.961 94.982,43.429 97.455,43.429 98.4,44.374 ; v2(125.146,88.189) R19.1@125.146,89
  Top Layer w1: D1.2@95.072,54.864 98.4,54.864 98.4,43.586
  Top Layer w1.5: D2.1@91.77,58.166 D1.2@95.072,54.864
  Bottom Layer w0.254: 121.202,63.721 124.993,67.513 124.993,75.257 124.079,76.171 124.079,86.893 v2@125.146,87.96
  Bottom Layer w0.3: v2(97.663,63.373) 98.011,63.721 121.202,63.721
  Bottom Layer w0.35: v7@96.672,42.977 v7(96.901,42.977) 97.231,42.647 97.231,39.599 96.876,39.243 v2(96.876,37.49)
CE: SPI1.6 SPI2.6 U1.12 | length 26.5
  Top Layer w0.254: U1.12@96.139,89.902 96.139,91.77 95.758,92.151 95.758,97.561 96.749,98.552 98.73,98.552 99.009,98.831 99.009,97.028 99.238,96.799 v2(99.238,95.402)
  Top Layer w0.7: 99.187,99.009 SPI1.6@99.187,100.032
  Bottom Layer w0.254: v2(99.238,95.402) 100.279,95.402 100.762,95.885 102.845,95.885 104.165,97.206 104.165,98.882
  Bottom Layer w0.6: 103.95,101.803 103.95,99.098 104.165,98.882
CMD2: 
CSN: SPI1.5 SPI2.5 U1.30 | length 30.3
  Top Layer w0.254: v2(96.952,86.055) 97,86.007 U1.30@97,81.853 ; v2(98.019,93.32) v2(98.019,95.809)
  Top Layer w0.3: 100.457,98.933 100.457,98.349 v2@101.054,97.752
  Top Layer w0.7: 100.457,98.933 SPI1.5@100.457,100.032
  Bottom Layer w0.254: v2(96.952,86.055) 98.019,87.122 v2(98.019,93.32) ; v2(98.019,95.809) 98.425,96.215 100.265,96.215 100.519,96.469 102.692,96.469 103.607,97.384 103.607,98.274 SPI2.5@102.68,99.2 ; v2(101.067,97.765) 101.549,97.765 102.68,98.895
  Bottom Layer w0.7: 102.68,98.895 102.68,101.752
DCJC: R13.2 U1.26 | length 28.3
  Top Layer w0.3: U1.26@93.8,81.853 93.8,82.853 94.386,83.439 v2(96.164,83.439) ; R13.2@108.55,90.9 R13.2@108.607,90.957
  Top Layer w0.7: R13.2@108.607,90.957 v2(109.626,90.957)
  Bottom Layer w0.3: v2@96.152,83.426 96.647,82.931 98.781,82.931 99.746,83.896 101.854,83.896 102.54,84.582 102.54,86.182 100.556,88.166 100.556,90.396 101.117,90.957 101.702,90.957 102.138,90.521 109.19,90.521 v2(109.626,90.957)
DM: R18.2 U1.24 | length 21.8
  Top Layer w0.254: 83.931,73.381 84.15,73.381 85.369,72.161 85.369,71.069 86.106,70.333 88.849,70.333 89.535,71.018 89.535,79.4 90.475,80.34 90.475,82.474 91.079,83.078 U1.24@91.775,83.078
  Top Layer w0.8: R18.2@83.214,73.381 83.863,73.381
DMD: DM.2 R18.1 | length 3.5
  Top Layer w0.254: 83.134,70.632 83.2,70.95
  Top Layer w0.8: DM.2@83.188,68.508 R18.1@83.188,71.65
DMLED: R17.2 U1.23 | length 53.7
  Top Layer w0.254: v2(84.582,71.73) 84.582,70.764 85.827,69.52 89.23,69.52 89.814,68.936 90.551,68.936 91.338,69.723 94.183,69.723 95.047,68.859 95.047,67.488 97.612,64.922 v2@97.815,64.922 ; U1.23@91.775,83.878 91.794,83.896 93.116,83.896 93.751,84.531 v2@93.751,85.014 ; v1(108.877,67.627) 108.877,67.399 108.89,67.386 R17.2@108.89,66.531
  Bottom Layer w0.254: v2(84.582,71.73) 84.404,71.907 84.404,76.556 85.979,78.13 85.979,78.784 89.415,82.22 90.475,82.22 93.113,84.858 v2(93.751,84.858) ; v2(97.841,64.948) 98.497,64.291 106.684,64.291 107.798,65.405 107.798,67.234 108.191,67.627 v1(108.877,67.627)
DW: D4.1 pad.4@126.6,75.209 | length 2.3
  Top Layer w0.4: D4.1@125.591,77.038 125.591,76.263 pad.4@126.644,75.209
DW+: DW.1 pad.4@126.6,73.482 | length 2.3
  Top Layer w0.7: DW.1@126.6,71.072 pad.4@126.6,73.406
FI-R: U1.27 U2.1 | length 42
  Top Layer w0.254: U1.27@94.6,81.853 94.6,80.681 93.548,79.629 93.548,70.841 94.082,70.307 94.317,70.307 95.631,68.994 95.631,67.894 97.307,66.218 v2(97.765,66.218) ; v2(107.213,69.164) 107.747,69.698 110.541,69.698 111.354,70.51 111.354,71.933 110.469,72.817 U2.1@108.154,72.817
  Bottom Layer w0.254: v2@97.663,66.37 97.663,66.167 99.031,64.799 106.252,64.799 107.213,65.761 v2(107.213,69.164)
FL: pad.0@113.78,112.932 R3.2 | length 11.9
  Top Layer w0.254: pad.0@113.65,112.822 113.538,112.822 113.538,112.932 pad.0@113.75,112.932
  Top Layer w0.6: pad.0@113.65,112.822 pad.0@113.69,112.862
  Top Layer w0.8: v2(111.785,105.131) R3.2@112.677,105.131
  Top Layer w1: v2(113.69,111.404) pad.0@113.69,112.862
  Bottom Layer w0.4: v2(111.785,105.131) 112.674,105.131 113.69,106.147 v2(113.69,111.404)
  Bottom Layer w1: v2(113.69,111.404) pad.0@113.69,112.862
FL-U: C3.2 R3.1 U1.6 | length 35.9
  Top Layer w0.254: U1.6@99.825,87.077 104.426,87.077 105.639,88.29 105.639,93.624 106.502,94.488 v2(106.832,94.488) ; C3.2@112.522,106.985 C3.2@112.831,106.985 ; C3.2@112.959,106.7 114.45,105.209 R3.1@114.45,105.105 ; R3.1@114.198,105.283 115.214,105.283 ; R3.1@114.579,105.207 115.291,105.207 v2(116.307,104.191)
  Bottom Layer w0.254: v2(106.832,94.488) 107.34,94.996 112.15,94.996 116.942,99.787 116.942,103.556 v2(116.307,104.191)
FM: R10.2 U1.25 | length 24.9
  Top Layer w0.254: R10.2@81.61,90.46 v2(81.61,91.211) ; v2(88.138,83.718) 88.697,83.16 v2@88.697,79.705
  Top Layer w0.3: v2(92.558,79.68) 93,80.122 U1.25@93,81.853
  Top Layer w0.7: R10.2@81.61,90.3 v2(81.61,91.211)
  Bottom Layer w0.254: v2@81.636,91.211 81.636,91.389 81.61,91.415 v2(81.61,91.211) 81.61,87.859 85.75,83.718 v2(88.138,83.718) ; v2(88.748,79.705) 89.713,78.74 91.618,78.74 v2(92.558,79.68)